# Altium PCB PCB2.PcbDoc
Units mm, origin at the board's own origin, x right, y up, seen from the top; angles counter-clockwise.
Board outline 51.05 x 45.85 mm, 2 copper layers (Top Layer, Bottom Layer); 6 components, 5 nets, 38 pads, 2 vias.
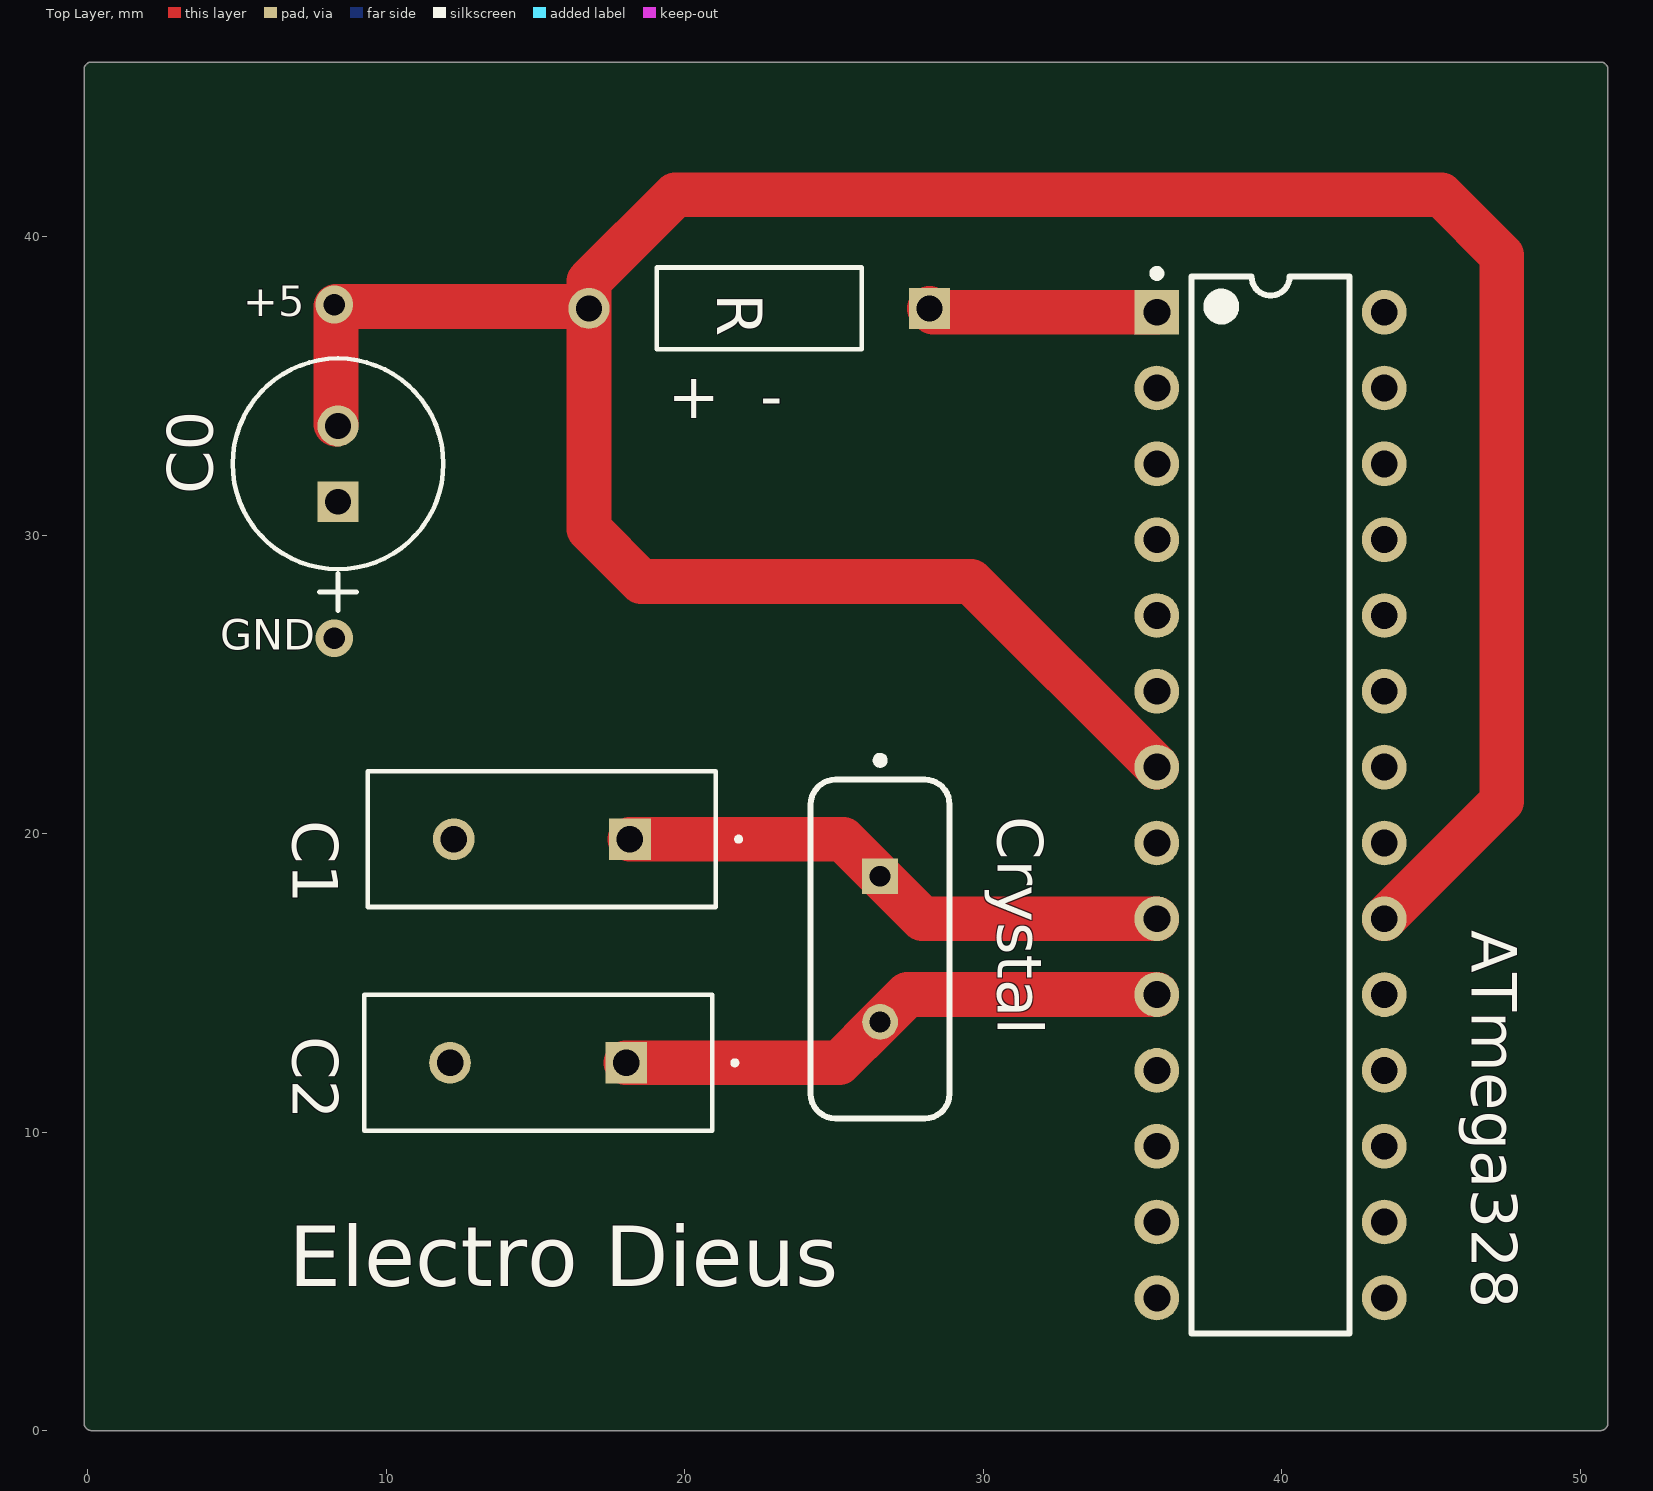
[diagram p0: Top Layer view]
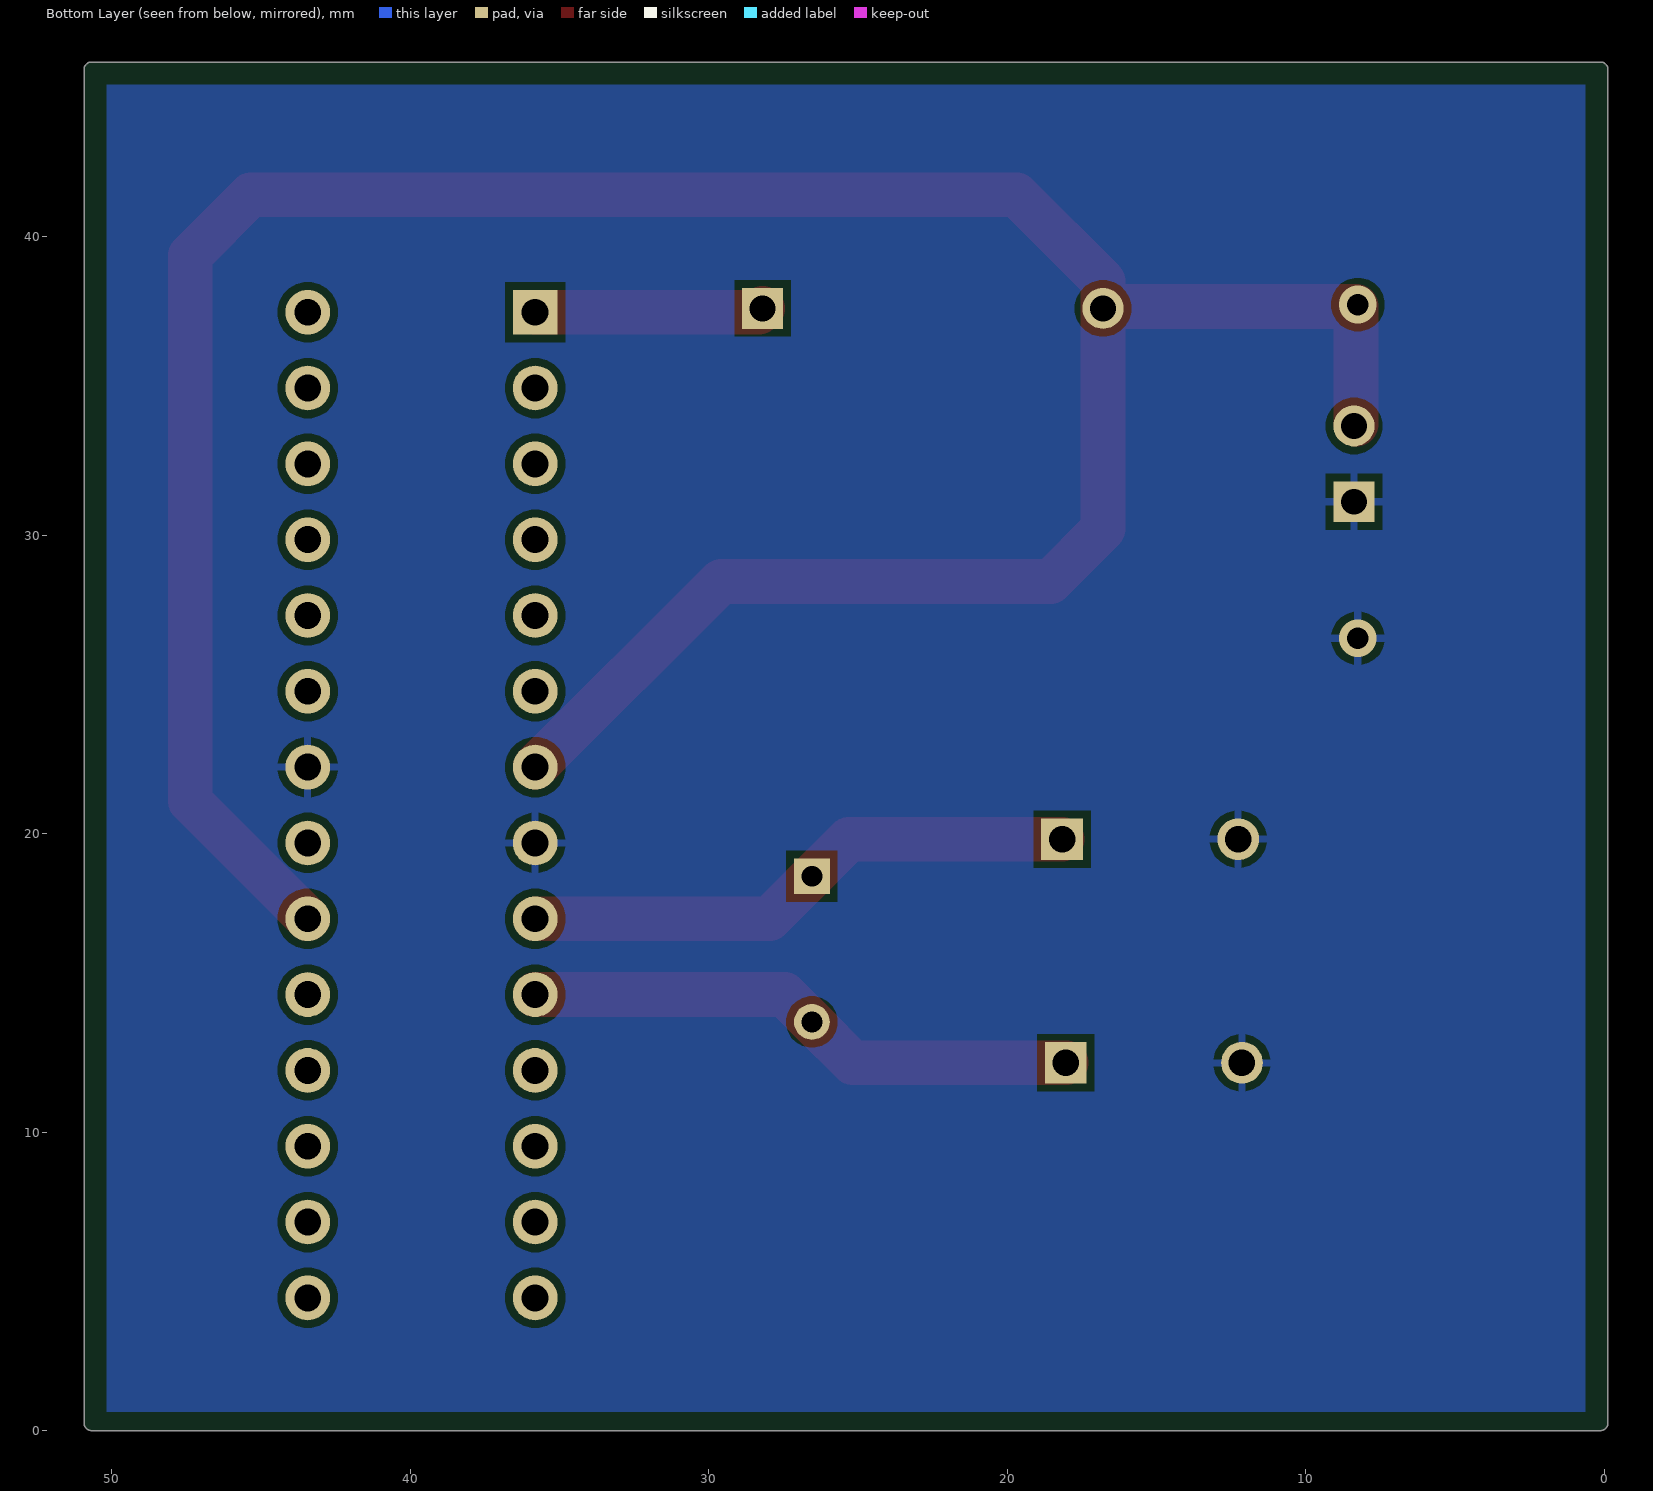
[diagram p1: Bottom Layer view, seen from below]
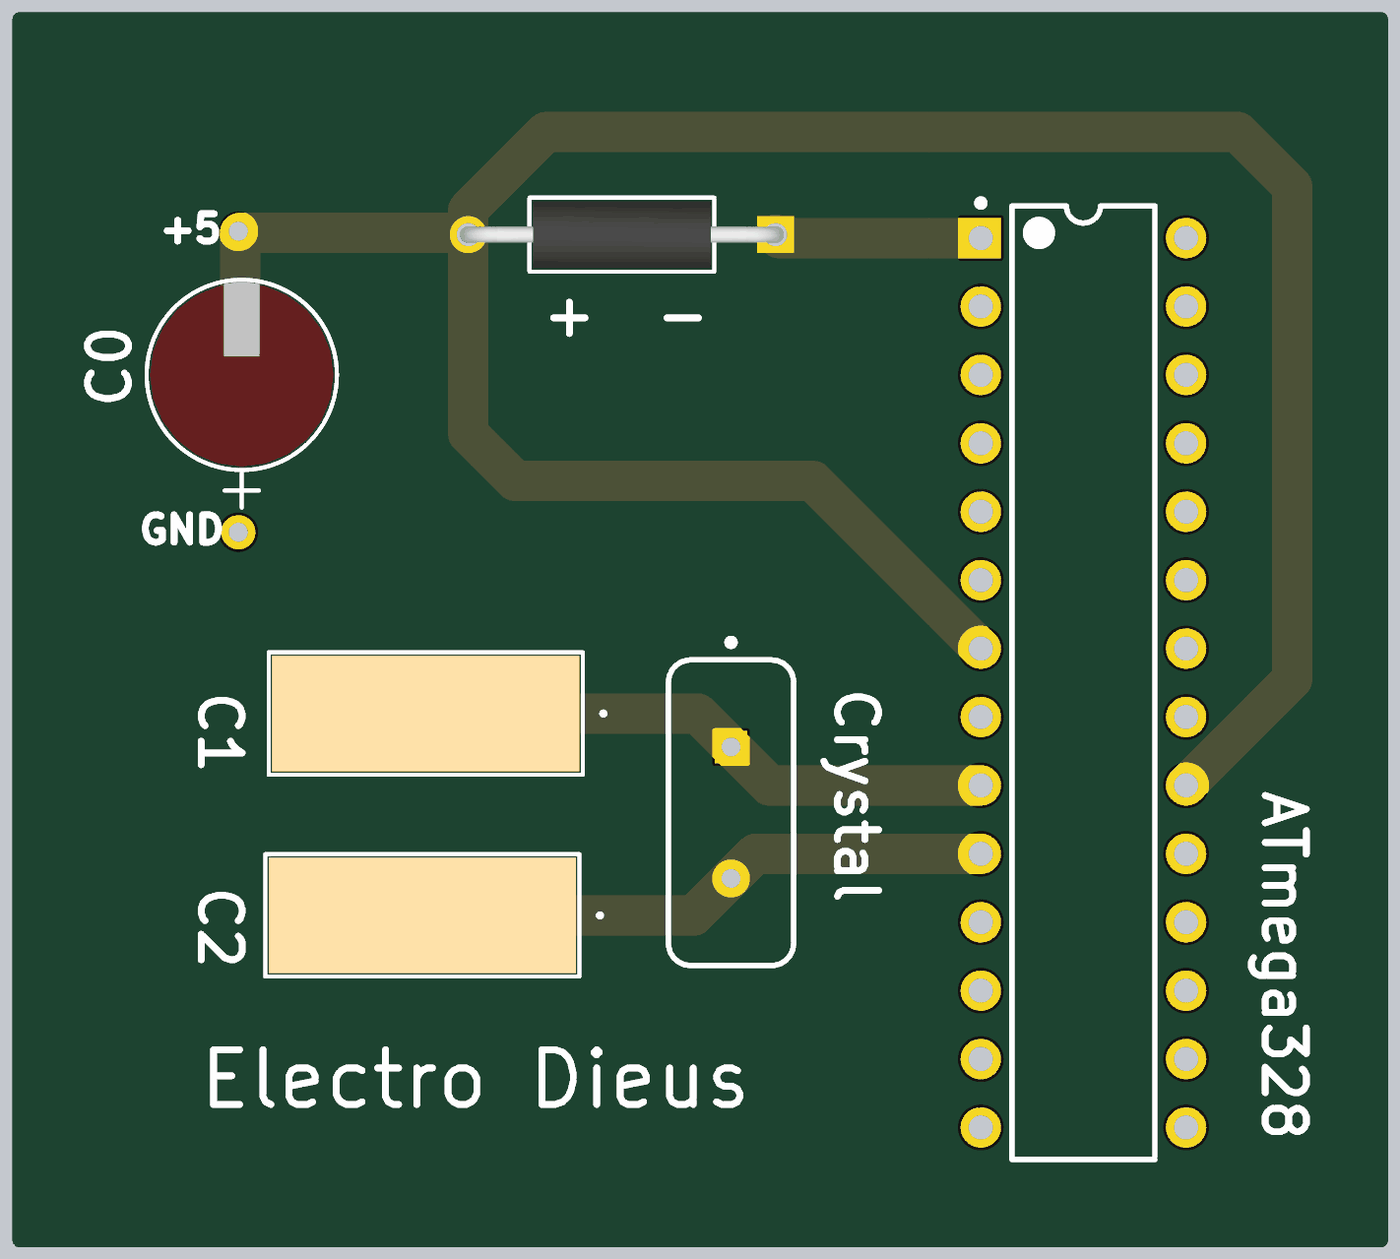
[diagram p2: 3D render of the assembled board from above, using the file's embedded part models]

## Layer stack, top to bottom
Top Solder: solder mask 0.0102, Solder Resist, Dk 3.5
Top Layer: signal copper 0.0356
Dielectric 1: dielectric 0.32, FR-4, Dk 4.8
Bottom Layer: signal copper 0.0356
Bottom Solder: solder mask 0.0102, Solder Resist, Dk 3.5

## Board outline
-0.127,0.254 ccw(c0.127,0.254) 0.127,0 50.673,0 ccw(c50.673,0.254) 50.927,0.254 50.927,45.593 ccw(c50.673,45.593) 50.673,45.847 0.127,45.847 ccw(c0.127,45.593) -0.127,45.593

## Design rules (kind name [scope] priority, off if disabled: settings)
Clearance Clearance_1 [OnMid vs OnMid] p1: gap=0.254 ignorepadtopadclearanceinfootprint=FALSE sourcerule=36 cellrowname=All cellrowtype=0 cellcolname=All cellcoltype=0 innerlayers=TRUE
Clearance Clearance_2 [(ExistsOnLayer('Top Layer') Or ExistsOnLayer('Bottom Layer')) vs (ExistsOnLayer('Top Layer') Or ExistsOnLayer('Bottom Layer'))] p2: gap=0.254 ignorepadtopadclearanceinfootprint=FALSE sourcerule=36 cellrowname=All cellrowtype=0 cellcolname=All cellcoltype=0 outerlayers=TRUE
Clearance [All] p3: gap=0.254 ignorepadtopadclearanceinfootprint=FALSE ismatrix=TRUE
PolygonConnect [All] p1: connectstyle=Relief reliefconductorwidth=0.254 reliefentries=4 polygonreliefangle="90 Angle" airgapwidth=0.254
RoutingVias [All] p1: holewidth=0.711 width=1.27 viastyle="Through Hole" minholewidth=0.711 minwidth=1.27 maxholewidth=0.711 maxwidth=1.27
SolderMaskExpansion [All] p1: expansion=0.102 istentingtop=FALSE
Width [All] p1: maxlimit=0.254 minlimit=0.254 preferedwidth=0.254
30 further rules are at their usual default settings.

## Components (designator, comment, footprint, x,y, rotation, side; value= is the part's Value field where it differs from the comment)
ATmega328 "ATmega328-PU" 28P3 39.624,20.955 r0 top locked (schematic designator "Micro Controller")
C0 "10uF" CAP_WCAP-PTHR_6P3X8P0_WRE 8.382,31.115 r90 top
C1 "30pF" CAP_CD15_CND 18.161,19.812 r180 top locked
C2 "30pF" CAP_CD15_CND 18.034,12.319 r180 top locked
Crystal "FOXSLF/160-20" FOX-FOXSLF160-20 26.543,16.129 r270 top locked (schematic designator "Crystal 16Mhz")
R "10K" RES_TYCO_YR1_TYC 28.194,37.592 r180 top locked

## Footprints (in the part's own frame and the unit in brackets; to place one, negate y for a bottom-side part, rotate by r counter-clockwise, add the part's x,y. Pads: shape width x height; smd on the part's side, far side on the other; paste and mask are expansions set on the pad)
28P3 [mm] "28-Pin Plastic Dual In-Line Package (PDIP)"
  rect 1.5x1.5 hole 0.9: 1(-3.81,16.51)
  round 1.5 hole 0.9: 2(-3.81,13.97) 3(-3.81,11.43) 4(-3.81,8.89) 5(-3.81,6.35) 6(-3.81,3.81) 7(-3.81,1.27) 8(-3.81,-1.27) 9(-3.81,-3.81) 10(-3.81,-6.35) 11(-3.81,-8.89) 12(-3.81,-11.43) 13(-3.81,-13.97) 14(-3.81,-16.51) 15(3.81,-16.51) 16(3.81,-13.97) 17(3.81,-11.43) 18(3.81,-8.89) 19(3.81,-6.35) 20(3.81,-3.81) 21(3.81,-1.27) 22(3.81,1.27) 23(3.81,3.81) 24(3.81,6.35) 25(3.81,8.89) 26(3.81,11.43) 27(3.81,13.97) 28(3.81,16.51)
  silkscreen extent -3.93,-17.7 2.65,17.93, body extent -3.6,-17.65 3.6,17.65, height 4.58
CAP_CD15_CND [mil]
  rect 55x55 / inner round 60 / far side rect 55x55 hole 35 paste-99999 mask+0: 1(0,0)
  round 55 / inner round 60 / far side round 55 hole 35 paste-99999 mask+0: 2(232.26,0)
  silkscreen extent -146,-90 346,90, body extent -108,-84 341,84, height 358
CAP_WCAP-PTHR_6P3X8P0_WRE [mil]
  rect 54x54 / inner round 60 / far side rect 54x54 hole 34 paste-99999 mask+0: 1(0,0)
  round 54 / inner round 60 / far side round 54 hole 34 paste-99999 mask+0: 2(100,0)
  silkscreen extent -144,-139 189,139, body extent -84,-134 185,134, height 375
FOX-FOXSLF160-20 [mm] "THD, 2-Leads, Body 11.35x4.65mm"
  rect 1.2x1.2 hole 0.7: 1(-2.44,0)
  round 1.2 hole 0.7: 2(2.44,0)
  silkscreen extent -6.45,-2.33 5.68,2.33, body extent -5.67,-2.32 5.68,2.33, height 3.6
RES_TYCO_YR1_TYC [mil]
  rect 54x54 / inner round 60 / far side rect 54x54 hole 34 paste-99999 mask+0: 1(0,0)
  round 54 / inner round 60 / far side round 54 hole 34 paste-99999 mask+0: 2(449,0)
  silkscreen extent 90,-54 360,54, body extent -12,-49 461,49, height 98

## Part data
ATmega328: library part CMP-0095-00015-2, "8-bit AVR Microcontroller, 32KB Flash, 1KB EEPROM, 2KB SRAM, 28-pin PDIP, Industrial Grade (-40°C to 85°C)", ComponentLink1Description="Manufacturer URL", ComponentLink1URL=http://www.atmel.com/, ComponentLink2Description="ATmega48A/48PA/88A/88PA/168A/168PA/328/328P Datasheet", ComponentLink2URL=http://www.atmel.com/dyn/resources/prod_documents/8271.pdf, ComponentLink3Description="ATmega48A/48PA/88A/88PA/168A/168PA/328/328P Summary", ComponentLink3URL=http://www.atmel.com/dyn/resources/prod_documents/8271S.pdf, DatasheetVersion="revD, May-2011", PackageDescription="28-lead (0.300\"/7.62mm Wide) Plastic Dual Inline Package (PDIP)", PackageReference=28P3, PackageVersion="revB, Sep-2001", RevisionNote="DatasheetVersion updated. URLs added."
C0: library part 870055673001, Mfr_Name="Wurth Electronics"
C1 C2: library part CD15ED300JO3F, "CD15ED300JO3F", Mfr_Name="Cornell Dubilier", Type="Mica and PTFE Capacitors"
Crystal: library part CMP-1749-00003-1, "Resistance Weld Thru-Hole Crystal, 16 MHz, -20 to 70 degC, 2-Pin THD, RoHS, Bulk", Case\Package=Axial, Max Operating Temperature="155 degC", Min Operating Temperature="-55 degC", Package Quantity=200, Power Rating="250 mW", Resistance="221 kohm", Tolerance=1%, Voltage Rating="250 V", ComponentLink1Description="Manufacturer URL", ComponentLink1URL=http://www.foxonline.com/, ComponentLink2Description=Datasheet, ComponentLink2URL=http://www.foxonline.com/pdfs/hc49slf.pdf, DatasheetVersion=Mar-15, Length="0.248 inch", Mount="Through Hole", PackageDescription="2-Pin Through Hole Device, Body 11.35 x 4.65 mm", PackageReference=FOXSLF160-20, Packaging=Bulk, RoHSCompliant=true
R: library part YR1B10KCC, "30pF", Mfr_Name="TE Connectivity"

## Via types
v1: diameter 1.27, hole 0.711, Top Layer to Bottom Layer, 2 vias

## Nets (pads, with @x,y where several pads share a name; then routed paths per layer and width w, separated by ;. In a path a pad name is that pad's centre, name@x,y a point inside that pad or via, vN(x,y) a via of type N, cw(c..) or ccw(c..) an arc to the next point about the centre after c; other vN are vias at no path point)
+5: ATmega328.7 ATmega328.20 C0.2 R.2 | length 99.7
  Top Layer w0.254: v1(8.255,37.719) v1@8.319,37.655 ; C0.2@8.319,33.718 C0.2 ; R.2@16.726,37.655 R.2
  Top Layer w1.5: C0.2@8.319,33.718 8.319,37.655 R.2@16.726,37.655 ; ATmega328.7 29.591,28.448 18.542,28.448 16.789,30.201 R.2 16.789,38.506 19.685,41.402 45.339,41.402 47.371,39.37 47.371,21.082 ATmega328.20
GND: ATmega328.8 ATmega328.22 C0.1 C1.2 C2.2 | length 0.6
  Top Layer w0.254: C0.1@8.255,30.988 C0.1 ; C0.1@8.731,30.702 C0.1@8.89,30.861 ; C2.2 C2.2@12.198,12.383 ; C1.2@12.198,19.748 C1.2
  other v1: 8.255,26.543
NetATmega328_1: ATmega328.1 R.1 | length 7.7
  Top Layer w1.5: R.1 28.321,37.465 ATmega328.1
NetATmega328_9: ATmega328.9 C1.1 Crystal.1 | length 18.8
  Top Layer w1.5: C1.1 25.3,19.812 Crystal.1 27.967,17.145 ATmega328.9
NetATmega328_10: ATmega328.10 C2.1 Crystal.2 | length 18.7
  Top Layer w1.5: C2.1 25.173,12.319 Crystal.2 27.459,14.605 ATmega328.10
pads on no net: ATmega328.2 ATmega328.3 ATmega328.4 ATmega328.5 ATmega328.6 ATmega328.11 ATmega328.12 ATmega328.13 ATmega328.14 ATmega328.15 ATmega328.16 ATmega328.17 ATmega328.18 ATmega328.19 ATmega328.21 ATmega328.23 ATmega328.24 ATmega328.25 ATmega328.26 ATmega328.27 ATmega328.28

## Polygon pours and split planes (outlines as drawn)
GND on Bottom Layer "GND_L02_P000" (solid, pour order 0): 0.635,45.085 0.635,0.635 50.165,0.635 50.165,45.085

## Silkscreen, mask and mechanical layers (free items; w line width, h text height)
Top Overlay:
  text "+5" at 5.207,37.338 h1.02
  text "+  -" at 19.431,33.909 h1.52
  text "GND" at 4.445,26.162 h1.02
  text "Electro Dieus" at 6.731,4.826 h2.03